# EAGLE board LightOrchestratedtouch-Draft-2d-BOARD v17 (EAGLE 9.7.0)
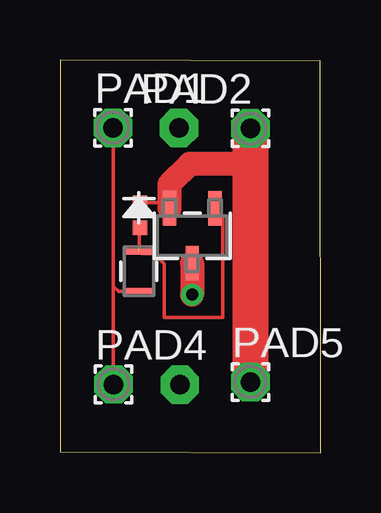
[diagram p0: board, top side]
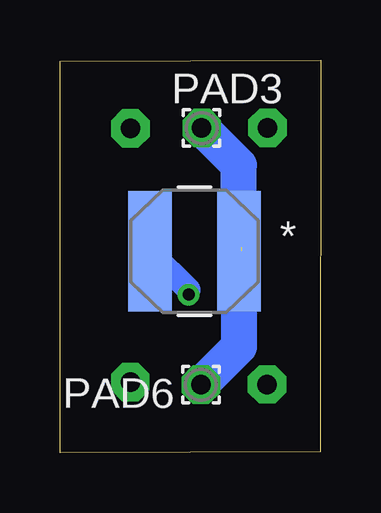
[diagram p1: board, bottom side, seen from below]

Size 10.86 x 16.39 mm. Coordinates in mm from the lower left corner, seen from the top.
Outline: 0.01,0.05 10.86,0 10.85,16.34 0,16.39 0.01,0.05
Copper layers (1*16): Top / Bottom
Stack-up Default Layer Stack: Top User Defined 0.035mm / Dielectric-1 User Defined 1.5mm / Bottom User Defined 0.035mm
Design rules: minimum copper width 6mil, minimum drill size 0.35mm, copper clearance wire_polygon to wire_polygon 6mil, copper clearance wire_polygon to pad_smd 6mil, copper clearance wire_polygon to via 6mil, copper clearance pad_smd to pad_smd 6mil, copper clearance pad_smd to via 6mil, copper clearance via to via 6mil, copper clearance smd to pad (same net) 6mil, copper clearance smd to via (same net) 6mil, copper clearance smd to smd (same net) 6mil, dimension clearance 40mil, via restrict clearance 0mil, restrict clearance 0mil, drill distance 6mil, keepout clearance 0mil

## Footprints (pad centres in the part's own frame; a part is rotated, then mirrored left to right if it is on the bottom)
1,6/0,8 = drill 0.813 pad 1.6 octagon: 1 0,0
TRANS_RPM-075P_ROM = smd 0.305 x 1.245: 1 -0.851,0; 2 0.851,0
IND_BOURNS_SDR0503 = smd 1.803 x 5.004: 1 -1.854,0; 2 1.854,0
TRANS_RDR005N_ROM = smd 0.559 x 1.422: 1 -0.95,-1.143; 2 0.95,-1.143; 3 0,1.143
CRCW040250K0FKED = smd 0.6 x 0.6: P$1 0,0; P$2 1.05,0

## Placement (x,y rotation side)
PAD1  [1,6/0,8]  2.21,13.56 0 top
PAD2  [1,6/0,8]  7.93,13.53 0 top
PAD3  [1,6/0,8]  4.96,13.55 0 bottom
PAD4  [1,6/0,8]  2.23,2.86 0 top
PAD5  [1,6/0,8]  7.93,2.96 0 top
PAD6  [1,6/0,8]  4.99,2.84 0 bottom
R3  RPM-075PTT86TRANS_RPM-075P_ROM  [TRANS_RPM-075P_ROM]  3.29,7.58 270 top
U$1  SDR0503-153JL  [IND_BOURNS_SDR0503]  5.26,8.41 180 bottom
U$2  RQ5E070BNTCL  [TRANS_RDR005N_ROM]  5.51,9.06 180 top
U$3  CRCW040250K0FKED  [CRCW040250K0FKED]  3.33,9.38 90 top

## Library data of the parts
PAD1-PAD6 = wirepad
R3 = RPM-075PTT86; COPYRIGHT: Copyright (C) 2025 Ultra Librarian. All rights reserved.; MANUFACTURER_PART_NUMBER: RPM-075PTT86; MFR_NAME: ROHM Semiconductor
U$1 = SDR0503153JL
U$2 = RQ5E070BNTCL
U$3 = CRCW040250K0FKED

## Nets
N$1 [New Class]: R3.1 U$2.1 U$3.P$1
N$2 [New Class]: PAD3.1 PAD6.1 U$1.1
N$3 [New Class]: PAD1.1 PAD4.1 R3.2
N$4 [New Class]: U$1.2 U$2.3
N$6 [New Class]: PAD2.1 PAD5.1 U$2.2 U$3.P$2

## Tracks (layer width: path | path; a pad name or v marks a point on that pad's centre or on a via)
N$1  (1 unrouted)
  Top 0.152: U$3.P$1 3.29,9.35 3.29,8.57 | R3.1 3.4,8.31 3.91,8.31 4.34,7.88 4.34,5.65 6.79,5.65 6.79,9.87 U$2.1
N$2
  Bottom 1.5: PAD6.1 3.4,4.43 U$1.1 3.4,12 PAD3.1
N$3
  Top 0.152: R3.2 2.44,6.73 2.22,6.95 | 2.22,6.95 PAD1.1 | 2.22,6.95 2.22,2.87 PAD4.1
N$4  (via drill 0.5)
  Top 0.152: 5.51,7.84 U$2.3 | v5.51,6.61 v5.5,6.6
  Top 1: U$2.3 v5.51,6.61
  Bottom 0.152: 5.5,6.8 v5.5,6.6
  Bottom 1: U$1.2 5.5,6.8
N$6
  Top 0.152: U$3.P$2 4.33,10.44 U$2.2 | PAD5.1
  Top 1: U$2.2 4.56,11.2 5.41,12.05 7.93,12.05
  Top 1.5: PAD2.1 7.93,12.05 PAD5.1